# EAGLE board TE Module driver (EAGLE 9.6.2)
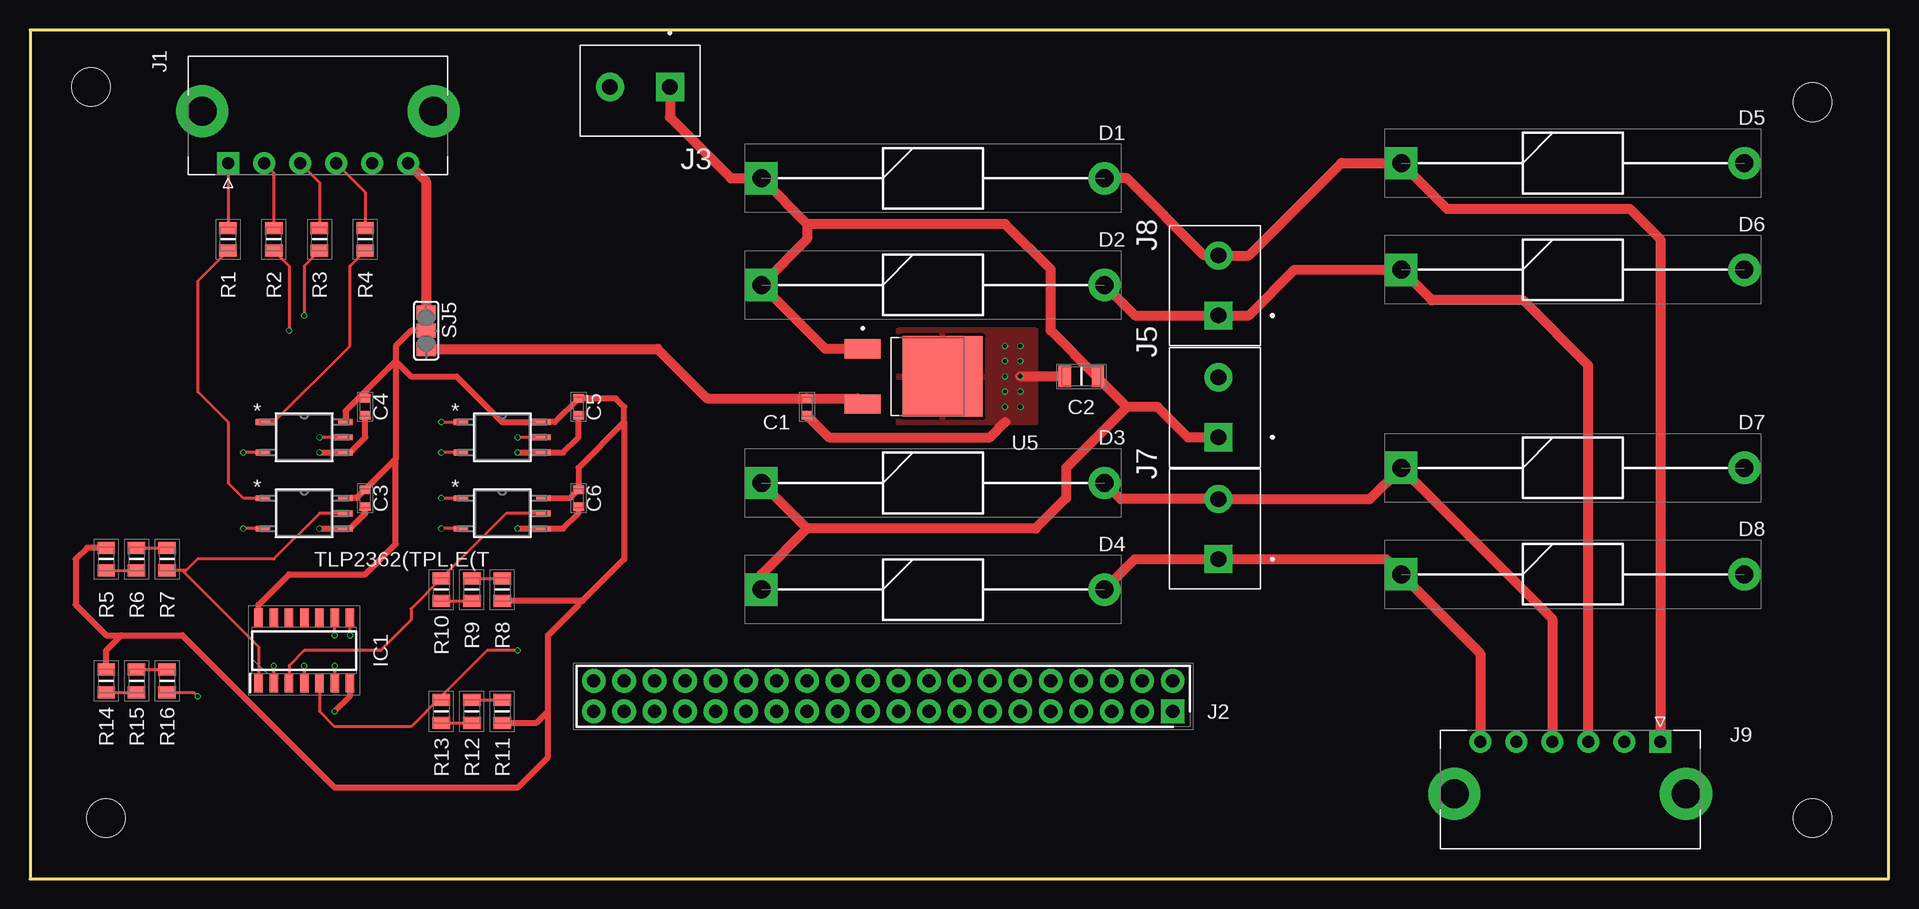
[diagram p0: board, top side]
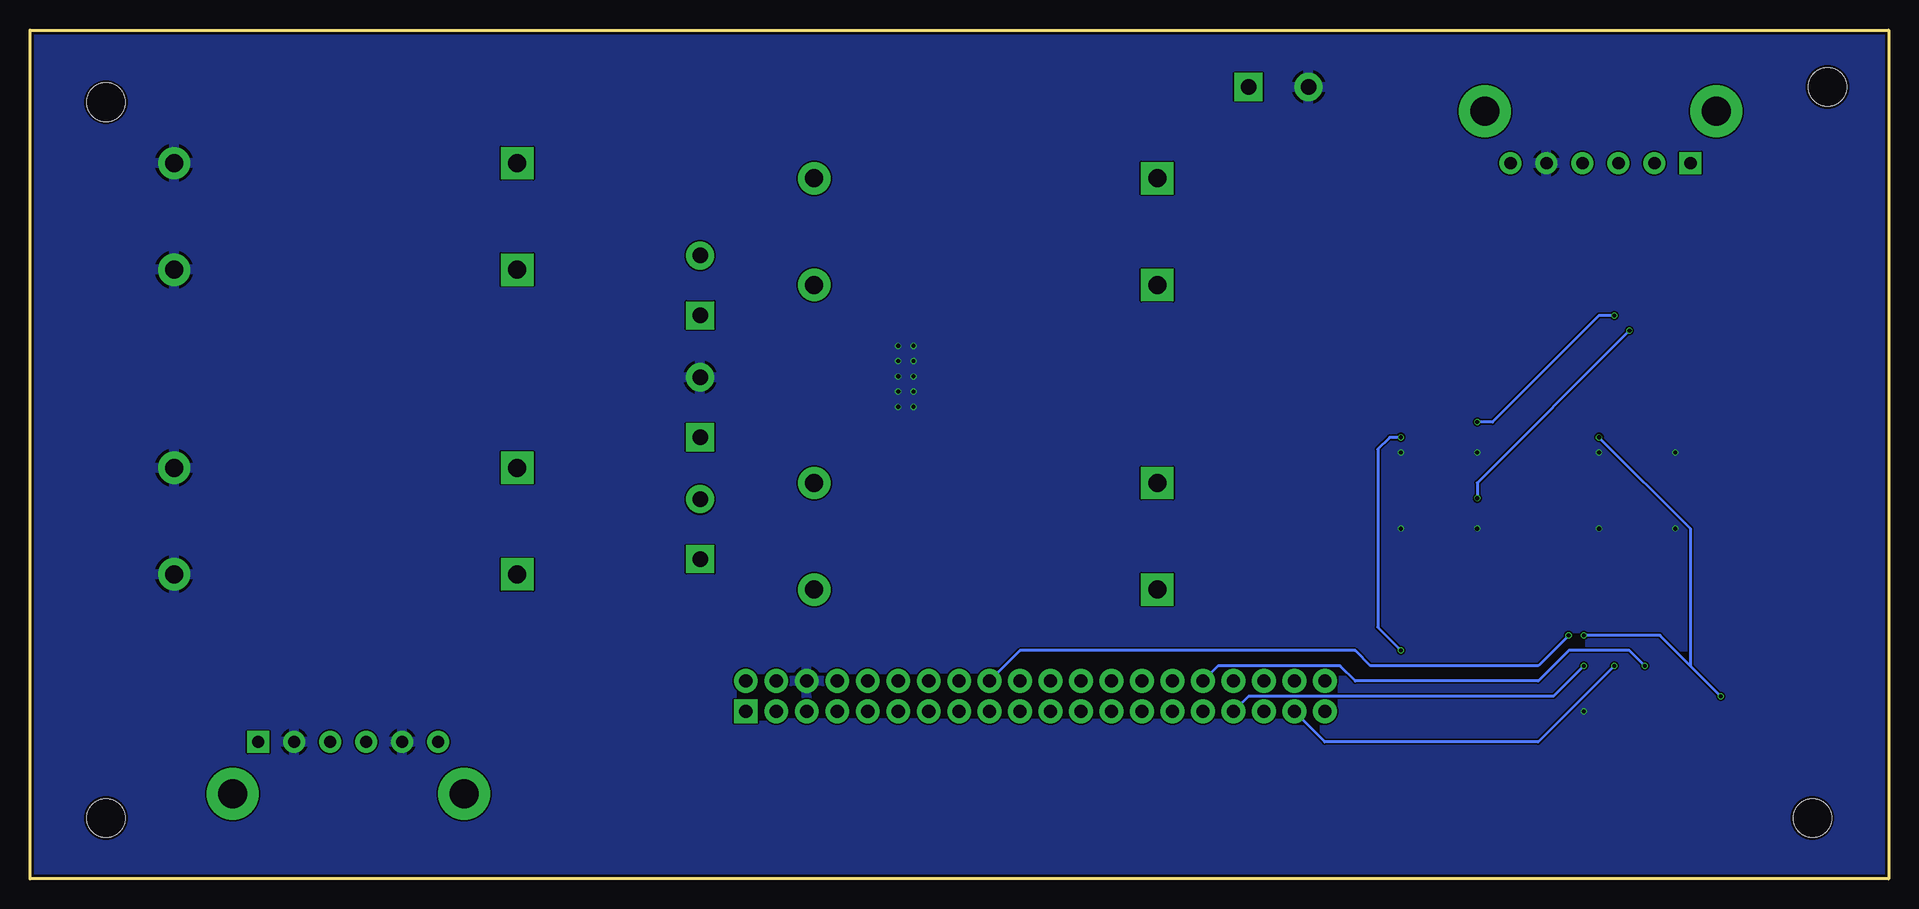
[diagram p1: board, bottom side, seen from below]

Size 154.92 x 70.79 mm. Coordinates in mm from the lower left corner, seen from the top.
Outline: 0,0 154.92,0 154.92,70.79 0,70.79 0,0
Copper layers (1*16): Top 0.035mm / dielectric 1.6mm / Bottom 0.035mm
Design rules "jlcpcb-2layers": minimum track width 5mil, minimum drill 0.3mm, track to track 5mil, track to pad 5mil, pad to pad 5mil, via to via 5mil, smd to smd 5mil, copper to edge 0.2mm, drill to drill 6mil, minimum pad ring 10mil, minimum via ring 3mil, stop-mask expansion 4mil, vias tented up to drill 0mil, thermal gap 10mil
Holes 3.2 mm at 6.35,5.08 5.08,66.04 148.59,64.77 148.59,5.08

## Footprints (pad centres in the part's own frame; a part is rotated, then mirrored left to right if it is on the bottom)
CAPC1608X90N = smd 0.73 x 0.94: 1 -0.71,0; 2 0.71,0
CAPC3216X140N = smd 1.02 x 1.78: 1 -1.38,0; 2 1.38,0
DIOAD2855W132L835D505 = drill 1.5 pad 2.25 square: 1 0,0 | drill 1.5 pad 2.25: 2 28.6,0
SOIC127P600X175-14N = smd 1.55 x 0.7: 1 -2.725,3.81; 2 -2.725,2.54; 3 -2.725,1.27; 4 -2.725,0; 5 -2.725,-1.27; 6 -2.725,-2.54; 7 -2.725,-3.81; 8 2.725,-3.81; 9 2.725,-2.54; 10 2.725,-1.27; 11 2.725,0; 12 2.725,1.27; 13 2.725,2.54; 14 2.725,3.81
MOLEX_436500603 = drill 1.02 pad 1.52 square: 1 0,0 | drill 1.02 pad 1.52: 2 -3,0; 3 -6,0; 4 -9,0; 5 -12,0; 6 -15,0 | drill 2.41 pad 2.91: S1 2.15,-4.32; S2 -17.15,-4.32
HDRV40W64P254_2X20_5080X508X83 = drill 1.1 pad 1.65 square: 1 0,0 | drill 1.1 pad 1.65: 2 0,-2.54; 3 2.54,0; 4 2.54,-2.54; 5 5.08,0; 6 5.08,-2.54; 7 7.62,0; 8 7.62,-2.54; 9 10.16,0; 10 10.16,-2.54; 11 12.7,0; 12 12.7,-2.54; 13 15.24,0; 14 15.24,-2.54; 15 17.78,0; 16 17.78,-2.54; 17 20.32,0; 18 20.32,-2.54; 19 22.86,0; 20 22.86,-2.54; 21 25.4,0; 22 25.4,-2.54; 23 27.94,0; 24 27.94,-2.54; 25 30.48,0; 26 30.48,-2.54; 27 33.02,0; 28 33.02,-2.54; 29 35.56,0; 30 35.56,-2.54; 31 38.1,0; 32 38.1,-2.54; 33 40.64,0; 34 40.64,-2.54; 35 43.18,0; 36 43.18,-2.54; 37 45.72,0; 38 45.72,-2.54; 39 48.26,0; 40 48.26,-2.54
CUI_TB002-500-02BE = drill 1.3 square: 1 0,0 | drill 1.3: 2 5,0
RESC2013X65N = smd 1 x 1.45: 1 -0.95,0; 2 0.95,0
SJ_2 = smd 1.168 x 1.6: 1 -1.524,0; 2 0,0; 3 1.524,0
5PIN_SO6_TOS = smd 1.208 x 0.466: 1 -3.442,1.27; 3 -3.442,-1.27; 4 3.442,-1.27; 5 3.442,0; 6 3.442,1.27
VREG_L78M05ABDT-TR = smd 3 x 1.6: 1 -4.25,2.3; 3 -4.25,-2.3 | smd 6.7 x 6.7: 2 2.4,0

## Placement (x,y rotation side)
C1  CL10B104KA8NNNC  [CAPC1608X90N]  64.77,39.37 270 top
C2  CL31B334KACNNNC  [CAPC3216X140N]  87.63,41.91 180 top
C3  CL10B104KA8NNNC  [CAPC1608X90N]  27.94,31.75 270 top
C4  CL10B104KA8NNNC  [CAPC1608X90N]  27.94,39.37 270 top
C5  CL10B104KA8NNNC  [CAPC1608X90N]  45.72,39.37 270 top
C6  CL10B104KA8NNNC  [CAPC1608X90N]  45.72,31.75 270 top
D1  UF5408-E3_54  [DIOAD2855W132L835D505]  60.96,58.42 0 top
D2  UF5408-E3_54  [DIOAD2855W132L835D505]  60.96,49.53 0 top
D3  UF5408-E3_54  [DIOAD2855W132L835D505]  60.96,33.02 0 top
D4  UF5408-E3_54  [DIOAD2855W132L835D505]  60.96,24.13 0 top
D5  UF5408-E3_54  [DIOAD2855W132L835D505]  114.3,59.69 0 top
D6  UF5408-E3_54  [DIOAD2855W132L835D505]  114.3,50.8 0 top
D7  UF5408-E3_54  [DIOAD2855W132L835D505]  114.3,34.29 0 top
D8  UF5408-E3_54  [DIOAD2855W132L835D505]  114.3,25.4 0 top
IC1  74HCT14D,653  [SOIC127P600X175-14N]  22.86,19.05 90 top
J1  436500603  [MOLEX_436500603]  16.51,59.69 180 top
J2  M20-9762042  [HDRV40W64P254_2X20_5080X508X83]  95.25,13.97 180 top
J3  TB002-500-02BE  [CUI_TB002-500-02BE]  53.34,66.04 180 top
J5  TB002-500-02BE  [CUI_TB002-500-02BE]  99.06,36.83 90 top
J7  TB002-500-02BE  [CUI_TB002-500-02BE]  99.06,26.67 90 top
J8  TB002-500-02BE  [CUI_TB002-500-02BE]  99.06,46.99 90 top
J9  436500603  [MOLEX_436500603]  135.89,11.43 0 top
R1  0805W8F1500T5E  [RESC2013X65N]  16.51,53.34 270 top
R2  0805W8F1500T5E  [RESC2013X65N]  20.32,53.34 270 top
R3  0805W8F1500T5E  [RESC2013X65N]  24.13,53.34 270 top
R4  0805W8F1500T5E  [RESC2013X65N]  27.94,53.34 270 top
R5  0805W8F1500T5E  [RESC2013X65N]  6.35,26.67 270 top
R6  0805W8F1500T5E  [RESC2013X65N]  8.89,26.67 270 top
R7  0805W8F1500T5E  [RESC2013X65N]  11.43,26.67 270 top
R8  0805W8F1500T5E  [RESC2013X65N]  39.37,24.13 90 top
R9  0805W8F1500T5E  [RESC2013X65N]  36.83,24.13 90 top
R10  0805W8F1500T5E  [RESC2013X65N]  34.29,24.13 90 top
R11  0805W8F1500T5E  [RESC2013X65N]  39.37,13.97 90 top
R12  0805W8F1500T5E  [RESC2013X65N]  36.83,13.97 90 top
R13  0805W8F1500T5E  [RESC2013X65N]  34.29,13.97 90 top
R14  0805W8F1500T5E  [RESC2013X65N]  6.35,16.51 270 top
R15  0805W8F1500T5E  [RESC2013X65N]  8.89,16.51 270 top
R16  0805W8F1500T5E  [RESC2013X65N]  11.43,16.51 270 top
SJ5  [SJ_2]  33.02,45.72 270 top
U1  TLP2362(TPL,E(T  [5PIN_SO6_TOS]  22.86,30.48 0 top
U2  TLP2362(TPL,E(T  [5PIN_SO6_TOS]  39.37,30.48 0 top
U3  TLP2362(TPL,E(T  [5PIN_SO6_TOS]  39.37,36.83 0 top
U4  TLP2362(TPL,E(T  [5PIN_SO6_TOS]  22.86,36.83 0 top
U5  L78M05ABDT-TR  [VREG_L78M05ABDT-TR]  73.66,41.91 0 top

## Library data of the parts
C1 C3-C6 = SamacSys_Parts; ARROW_PART_NUMBER: CL10B104KA8NNNC; ARROW_PRICE-STOCK: https://www.arrow.com/en/products/cl10b104ka8nnnc/samsung-electro-mechanics?region=europe; DESCRIPTION: Ceramic cap 0603 X7R 25V 100nF (Reel) Samsung Electro-Mechanics 100nF Multilayer Ceramic Capacitor (MLCC) 25 V +/-10% X7R dielectric CL max op. temp. +125C; HEIGHT: 0.9mm; LCSC_PART: C1590; MANUFACTURER_NAME: Samsung Electro-Mechanics; MANUFACTURER_PART_NUMBER: CL10B104KA8NNNC; MOUSER_PART_NUMBER: 187-CL10B104KA8NNNC; MOUSER_PRICE-STOCK: https://www.mouser.co.uk/ProductDetail/Samsung-Electro-Mechanics/CL10B104KA8NNNC?qs=349EhDEZ59rmu3pGeZXx0A%3D%3D
C2 = SamacSys_Parts; DESCRIPTION: Multilayer Ceramic Capacitors MLCC - SMD/SMT 330nF+/-10% 25V X7R 1206; HEIGHT: 1.4mm; LCSC_PART: C318760; MANUFACTURER_NAME: Samsung Electro-Mechanics; MANUFACTURER_PART_NUMBER: CL31B334KACNNNC
D1-D8 = SamacSys_Parts; ARROW_PART_NUMBER: UF5408-E3/54; ARROW_PRICE-STOCK: https://www.arrow.com/en/products/uf5408-e354/vishay?region=nac; DESCRIPTION: Rectifiers Vr/1000V Io/3A; HEIGHT: mm; MANUFACTURER_NAME: Vishay; MANUFACTURER_PART_NUMBER: UF5408-E3/54; MOUSER_PART_NUMBER: 625-UF5408-E3; MOUSER_PRICE-STOCK: https://www.mouser.co.uk/ProductDetail/Vishay-General-Semiconductor/UF5408-E3-54?qs=D6r9GjgEnNMkLmquNRV%2FYA%3D%3D
IC1 = SamacSys_Parts; ARROW_PART_NUMBER: 74HCT14D,653; ARROW_PRICE-STOCK: https://www.arrow.com/en/products/74hct14d653/nexperia?region=europe; DESCRIPTION: 74HC(T)14 - Hex inverting Schmitt trigger@en-us; HEIGHT: 1.75mm; LCSC_PART: C5967; MANUFACTURER_NAME: Nexperia; MANUFACTURER_PART_NUMBER: 74HCT14D,653; MOUSER_PART_NUMBER: 771-74HCT14D-T; MOUSER_PRICE-STOCK: https://www.mouser.co.uk/ProductDetail/Nexperia/74HCT14D653?qs=P62ublwmbi%2FQcvMOcCK30w%3D%3D; PACKAGE: SOIC-14_3.9x8.7x1.27P
J1 J9 = SnapEDA Library; MANUFACTURER: Molex; MAXIMUM_PACKAGE_HEIGHT: 5.57 mm; PARTREV: F3; STANDARD: Manufacturer Recommendations
J2 = SamacSys_Parts; DESCRIPTION: Headers & Wire Housings 20+20 DIL VERTICAL PIN HEADER GOLD+TIN; HEIGHT: 8.38mm; MANUFACTURER_NAME: Harwin; MANUFACTURER_PART_NUMBER: M20-9762042; MOUSER_PART_NUMBER: 855-M20-9762042; MOUSER_PRICE-STOCK: https://www.mouser.co.uk/ProductDetail/Harwin/M20-9762042?qs=vF78I%252BjhbY9cC9ob9MEFaw%3D%3D
J3 J5 J7 J8 = SnapEDA Library; MANUFACTURER: CUI; STANDARD: Manufacturer Recommendations
R1-R16 = SamacSys_Parts; DESCRIPTION: Thick Film Resistors - SMD 0805 1/8W 1% 150R T/R-5000; HEIGHT: 0.65mm; LCSC_PART: C17471; MANUFACTURER_NAME: ROYALOHM; MANUFACTURER_PART_NUMBER: 0805W8F1500T5E
SJ5 = jumper
U1-U4 = SnapEDA Library; COPYRIGHT: Copyright (C) 2022 Ultra Librarian. All rights reserved.; LCSC_PART: C37658; MANUFACTURER_PART_NUMBER: TLP2362(TPL,E(T; MFR_NAME: Toshiba Electronic Devices & Storage Co.; PACKAGE: SOP-5_3.6x4.4x1.27P
U5 = SnapEDA Library; LCSC_PART: C58069; MANUFACTURER: STMicroelectronics; MAXIMUM_PACKAGE_HEIGHT: 2.4 mm; PACKAGE: TO-252-2; PARTREV: 23; STANDARD: Manufacturer Recommendations

## Nets
+5V: C3.1 C4.1 C5.1 C6.1 IC1.14 R5.1 R8.1 R11.1 R14.1 SJ5.2 U1.6 U2.6 U3.6 U4.6
GND: C1.2 C2.2 C3.2 C4.2 C5.2 C6.2 D5.2 D6.2 D7.2 D8.2 IC1.7 J1.5 J2.6 J3.2 J5.2 J9.2 J9.5 U1.3 U1.4 U2.3 U2.4 U3.3 U3.4 U4.3 U4.4 U5.2
N$1: J1.2 R2.1
N$2: D4.2 D8.1 J7.1 J9.6
N$3: D3.2 D7.1 J7.2 J9.4
N$4: D2.2 D6.1 J8.1 J9.3
N$5: D1.2 D5.1 J8.2 J9.1
N$6: R2.2 U2.1
N$7: R1.2 U1.1
N$8: IC1.3 R10.2 U2.5
N$9: IC1.5 R13.2 U3.5
N$10: R3.2 U3.1
N$11: R4.2 U4.1
N$12: C1.1 SJ5.3 U5.3
N$14: IC1.1 R7.2 U1.5
N$15: R5.2 R6.2
N$16: R6.1 R7.1
N$18: J1.6 SJ5.1
N$19: J1.1 R1.1
N$20: J1.3 R3.1
N$21: J1.4 R4.1
N$26: R8.2 R9.2
N$27: R9.1 R10.1
N$30: R11.2 R12.2
N$31: R12.1 R13.1
N$33: IC1.9 R16.2 U4.5
N$34: R14.2 R15.2
N$35: R15.1 R16.1
PWM1: IC1.2 J2.32
PWM2: IC1.4 J2.37
PWM3: IC1.6 J2.33
PWM4: IC1.8 J2.18
VCC: C2.1 D1.1 D2.1 D3.1 D4.1 J3.1 J5.1 U5.1

## Tracks (layer width: path | path; a pad name or v marks a point on that pad's centre or on a via)
+5V
  Top 0.508: SJ5.2 31.75,45.72 30.48,44.45 30.48,43.18 | U4.6 26.3,39 27.94,40.64 | 30.48,43.18 27.94,40.64 | 30.48,35 C3.1 27.23,31.75 U1.6 | 30.48,43.18 30.48,35 | 27.94,40.64 C4.1 | 49.53,38.1 45.72,34.29 C6.1 45.01,31.75 U2.6 | 49.53,38.1 49.53,39.37 48.82,40.08 C5.1 43.74,38.1 U3.6 39.37,38.1 35.56,41.91 31.75,41.91 30.48,43.18 | 49.53,38.1 49.53,26.67 46.04,23.18 45.72,23.18 | 45.72,23.18 R8.1 | 45.72,23.18 45.72,22.86 43.18,20.32 43.18,13.97 | R5.1 4.76,27.62 3.81,26.67 3.81,22.86 6.35,20.32 7.62,20.32 | 43.18,13.97 43.18,10.16 40.64,7.62 25.4,7.62 12.7,20.32 7.62,20.32 | R11.1 42.23,13.02 43.18,13.97 | IC1.14 19.05,22.86 21.59,25.4 27.94,25.4 30.48,27.94 30.48,35 | R14.1 6.35,19.05 7.62,20.32
GND  (via drill 0.35)
  Top 0.254: U1.3 v17.78,29.21 | U2.3 v34.29,29.21 | U4.3 v17.78,35.56 | U3.3 v34.29,35.56
  Top 0.508: C3.2 27.94,30.48 26.67,29.21 U1.4 v24.13,29.21 | C4.2 27.94,36.83 26.67,35.56 U4.4 v24.13,35.56 | C5.2 45.72,36.83 44.45,35.56 U3.4 v40.64,35.56 | C6.2 45.72,30.48 44.45,29.21 U2.4 v40.64,29.21 | v25.4,13.97 26.67,15.24 IC1.7
  Top 0.813: C1.2 66.6,36.83 80.01,36.83 81.28,38.1 | C2.2 v82.55,41.91
  other vias: 81.28,39.37 81.28,40.64 81.28,41.91 81.28,43.18 81.28,44.45 82.55,44.45 82.55,43.18 82.55,40.64 82.55,39.37
  pour Bottom: 0,71.12 154.94,71.12 154.94,0 0,0
  pour Top: 72.39,45.72 72.39,38.1 83.82,38.1 83.82,45.72
N$1
  Top 0.254: J1.2 20.32,58.88 R2.1
N$2
  Top 0.813: D4.2 92.1,26.67 J7.1 113.03,26.67 D8.1 120.89,18.81 J9.6
N$3
  Top 0.813: D3.2 90.91,31.67 J7.2 111.68,31.67 D7.1 126.89,21.7 J9.4
N$4
  Top 0.813: J9.3 129.89,42.83 124.46,48.26 116.84,48.26 D6.1 105.41,50.8 101.6,46.99 J8.1 92.1,46.99 D2.2
N$5
  Top 0.813: J9.1 135.89,53.34 133.35,55.88 118.11,55.88 D5.1 109.3,59.69 101.6,51.99 J8.2 97.87,51.99 91.44,58.42 D1.2
N$6  (via drill 0.35)
  Top 0.254: v34.29,31.75 U2.1 | R2.2 21.59,51.12 v21.59,45.72
  Bottom 0.254: v34.29,31.75 34.29,33.02 v21.59,45.72
N$7
  Top 0.254: U1.1 17.78,31.75 16.51,33.02 16.51,38.1 13.97,40.64 13.97,49.85 R1.2
N$8
  Top 0.254: U2.5 39.69,30.48 R10.2 31.75,22.54 31.75,21.59 29.21,19.05 22.86,19.05 21.59,17.78 IC1.3
N$9  (via drill 0.35)
  Top 0.254: U3.5 v40.64,36.83 | IC1.5 24.13,13.97 25.4,12.7 31.75,12.7 34.29,15.24 | v40.64,19.05 38.1,19.05 34.29,15.24 | 34.29,15.24 R13.2
  Bottom 0.254: v40.64,36.83 41.57,36.83 42.57,35.83 42.57,20.98 v40.64,19.05
N$10  (via drill 0.35)
  Top 0.254: v34.29,38.1 U3.1 | R3.2 22.86,51.12 v22.86,46.99
  Bottom 0.254: v22.86,46.99 24.13,46.99 33.02,38.1 v34.29,38.1
N$11
  Top 0.254: U4.1 20.32,38.1 26.67,44.45 26.67,51.12 R4.2
N$12
  Top 0.813: SJ5.3 52.32,44.2 56.44,40.08 C1.1 68.94,40.08 U5.3
N$14
  Top 0.254: 12.7,25.72 13.02,25.72 13.97,26.67 20.32,26.67 24.13,30.48 U1.5 | 12.7,25.72 R7.2 | 12.7,25.72 19.05,19.37 IC1.1
N$15
  Top 0.254: R5.2 R6.2
N$16
  Top 0.254: R6.1 R7.1
N$18
  Top 0.813: J1.6 33.02,58.18 SJ5.1
N$19
  Top 0.254: J1.1 R1.1
N$20
  Top 0.254: J1.3 24.13,58.07 R3.1
N$21
  Top 0.254: J1.4 27.94,57.26 R4.1
N$26
  Top 0.254: R9.2 R8.2
N$27
  Top 0.254: R10.1 R9.1
N$30
  Top 0.254: R12.2 R11.2
N$31
  Top 0.254: R13.1 R12.1
N$33  (via drill 0.35)
  Top 0.254: U4.5 v24.13,36.83 | R16.2 13.65,15.56 v13.97,15.24 | v25.4,20.32 IC1.9
  Bottom 0.254: v24.13,36.83 16.51,29.21 16.51,17.78 v13.97,15.24 19.05,20.32 v25.4,20.32
N$34
  Top 0.254: R14.2 R15.2
N$35
  Top 0.254: R15.1 R16.1
PWM1  (via drill 0.35)
  Top 0.254: v20.32,17.78 IC1.2
  Bottom 0.254: v20.32,17.78 21.59,19.05 26.67,19.05 29.21,16.51 44.45,16.51 45.72,17.78 55.88,17.78 J2.32
PWM2  (via drill 0.35)
  Top 0.254: v22.86,17.78 IC1.4
  Bottom 0.254: v22.86,17.78 29.21,11.43 46.99,11.43 J2.37
PWM3  (via drill 0.35)
  Top 0.254: v25.4,17.78 IC1.6
  Bottom 0.254: v25.4,17.78 27.94,15.24 53.34,15.24 J2.33
PWM4  (via drill 0.35)
  Top 0.254: v26.67,20.32 IC1.8
  Bottom 0.254: v26.67,20.32 29.21,17.78 43.18,17.78 44.45,19.05 72.39,19.05 J2.18
VCC
  Top 0.813: 91.44,39.37 86.36,34.29 86.36,31.75 83.82,29.21 64.77,29.21 | 64.77,29.21 D3.1 | 64.77,29.21 60.96,25.4 D4.1 | 64.77,54.61 D1.1 58.42,58.42 53.34,63.5 J3.1 | 91.44,39.37 88.9,41.91 | 88.9,41.91 85.09,45.72 85.09,50.8 81.28,54.61 64.77,54.61 | 64.77,54.61 64.77,53.34 D2.1 66.28,44.21 U5.1 | C2.1 88.9,41.91 | J5.1 96.52,36.83 93.98,39.37 91.44,39.37